# EAGLE board pde_avc_5 (EAGLE 9.7.0)

Size 270.65 x 152.55 mm. Coordinates in mm from the lower left corner, seen from the top.
Outline: 0,0 270.65,0 270.65,152.55 0,152.55 0,0
Copper layers (1*16): Top 0.035mm / dielectric 1.5mm / Bottom 0.035mm
Design rules "default": minimum track width 6mil, minimum drill 0.35mm, track to track 6mil, track to pad 6mil, pad to pad 6mil, via to via 6mil, smd to smd 6mil, copper to edge 40mil, drill to drill 6mil, minimum pad ring 10mil, minimum via ring 8mil, stop-mask expansion 4mil, vias tented up to drill 0mil, thermal gap 10mil

## Footprints (pad centres in the part's own frame; a part is rotated, then mirrored left to right if it is on the bottom)
LEDRD254W60D565H860B = drill 0.981 pad 1.581: 1 -1.27,0; 2 1.27,0
1X08 = drill 1.016 long: 1 -8.89,0; 2 -6.35,0; 3 -3.81,0; 4 -1.27,0; 5 1.27,0; 6 3.81,0; 7 6.35,0; 8 8.89,0
PIEZO = drill 1 pad 1.6: 1 -3.5,0; 2 3.5,0
28027 = drill 1.016 long: 1 -2.54,0; 2 0,0; 3 2.54,0
HA-06-SM065 = drill 1 pad 1.676: 1 -2.54,-2.54; 2 0,2.54; 3 2.54,-2.54
RESAD1016W63L850D250B = drill 0.83 pad 1.43: 1 -5.08,0; 2 5.08,0
ARDUINO-UNO-R3-SHIELD = drill 1.016 pad 1.88: 3.3V 24.13,-2.54; 5V 24.13,0; A0 24.13,12.7; A1 24.13,15.24; A2 24.13,17.78; A3 24.13,20.32; A4 24.13,22.86; A5 24.13,25.4; AREF -24.13,-13.97; D2 -24.13,20.32; D3 -24.13,17.78; D4 -24.13,15.24; D5 -24.13,12.7; D6 -24.13,10.16; D7 -24.13,7.62; D8 -24.13,3.81; D9 -24.13,1.27; D10 -24.13,-1.27; D11 -24.13,-3.81; D12 -24.13,-6.35; D13 -24.13,-8.89; GND@0 24.13,2.54; GND@1 24.13,5.08; GND@2 -24.13,-11.43; IOREF 24.13,-7.62; NC 24.13,-10.16; RES 24.13,-5.08; RX -24.13,25.4; SCL -24.13,-19.05; SDA -24.13,-16.51; TX -24.13,22.86; VIN 24.13,7.62
JHD-162A = drill 1.016 long: 1 -19.05,0; 2 -16.51,0; 3 -13.97,0; 4 -11.43,0; 5 -8.89,0; 6 -6.35,0; 7 -3.81,0; 8 -1.27,0; 9 1.27,0; 10 3.81,0; 11 6.35,0; 12 8.89,0; 13 11.43,0; 14 13.97,0; 15 16.51,0; 16 19.05,0

## Placement (x,y rotation side)
D1  RED  [LEDRD254W60D565H860B]  102.13,114.94 180 top
KEYPADTECLADO_MATRICIAL_4X4  KEYPAD-4X4  [1X08]  122.31,104.65 0 top
PIEZOBUZZER_1  PIEZO  [PIEZO]  20.4,13.58 0 top
PIRSENSOR_PIR_1  PIR-SENSOR_28027  [28027]  225.03,48.31 0 top
RPOT1  250k  [HA-06-SM065]  246.11,145.5 0 top
RRESISITOR_7  220  [RESAD1016W63L850D250B]  103.4,107.51 90 top
RRESISTOR_5  330k  [RESAD1016W63L850D250B]  234.07,130.11 90 top
RRESISTOR_6  1k  [RESAD1016W63L850D250B]  8.97,11.04 0 top
UARDUINO_UNO_R3_1  ARDUINO-UNO-R3-SHIELD  [ARDUINO-UNO-R3-SHIELD]  111.88,65.96 270 top
ULCD_16X2  LCD-16X2JHD-162A  [JHD-162A]  215.02,115 0 top

## Library data of the parts
D1 = Tinkercad; CATEGORY: Opto-Electronic; SUB-CATEGORY: LED; VALUE: LED_RED
KEYPADTECLADO_MATRICIAL_4X4 PIEZOBUZZER_1 PIRSENSOR_PIR_1 RPOT1 RRESISITOR_7 RRESISTOR_5 RRESISTOR_6 UARDUINO_UNO_R3_1 ULCD_16X2 = Tinkercad

## Nets
D1_A: D1.1 RRESISITOR_7.2
PIEZOBUZZER_1_1: PIEZOBUZZER_1.1 RRESISTOR_6.2
UARDUINO_UNO_R3_1_5V: PIRSENSOR_PIR_1.2 RPOT1.1 UARDUINO_UNO_R3_1.5V ULCD_16X2.2 ULCD_16X2.15
UARDUINO_UNO_R3_1_A0: PIRSENSOR_PIR_1.1 UARDUINO_UNO_R3_1.A0 ULCD_16X2.4
UARDUINO_UNO_R3_1_A1: UARDUINO_UNO_R3_1.A1 ULCD_16X2.6
UARDUINO_UNO_R3_1_A2: UARDUINO_UNO_R3_1.A2 ULCD_16X2.11
UARDUINO_UNO_R3_1_A3: UARDUINO_UNO_R3_1.A3 ULCD_16X2.12
UARDUINO_UNO_R3_1_A4: UARDUINO_UNO_R3_1.A4 ULCD_16X2.13
UARDUINO_UNO_R3_1_A5: UARDUINO_UNO_R3_1.A5 ULCD_16X2.14
UARDUINO_UNO_R3_1_D2: KEYPADTECLADO_MATRICIAL_4X4.8 UARDUINO_UNO_R3_1.D2
UARDUINO_UNO_R3_1_D3: KEYPADTECLADO_MATRICIAL_4X4.7 UARDUINO_UNO_R3_1.D3
UARDUINO_UNO_R3_1_D4: KEYPADTECLADO_MATRICIAL_4X4.6 UARDUINO_UNO_R3_1.D4
UARDUINO_UNO_R3_1_D5: KEYPADTECLADO_MATRICIAL_4X4.5 UARDUINO_UNO_R3_1.D5
UARDUINO_UNO_R3_1_D6: KEYPADTECLADO_MATRICIAL_4X4.4 UARDUINO_UNO_R3_1.D6
UARDUINO_UNO_R3_1_D7: KEYPADTECLADO_MATRICIAL_4X4.3 UARDUINO_UNO_R3_1.D7
UARDUINO_UNO_R3_1_D8: KEYPADTECLADO_MATRICIAL_4X4.2 UARDUINO_UNO_R3_1.D8
UARDUINO_UNO_R3_1_D9: KEYPADTECLADO_MATRICIAL_4X4.1 UARDUINO_UNO_R3_1.D9
UARDUINO_UNO_R3_1_D12: RRESISTOR_6.1 UARDUINO_UNO_R3_1.D12
UARDUINO_UNO_R3_1_D13: RRESISITOR_7.1 UARDUINO_UNO_R3_1.D13
UARDUINO_UNO_R3_1_GND: D1.2 PIEZOBUZZER_1.2 PIRSENSOR_PIR_1.3 RPOT1.3 RRESISTOR_5.2 UARDUINO_UNO_R3_1.GND@0 UARDUINO_UNO_R3_1.GND@1 UARDUINO_UNO_R3_1.GND@2 ULCD_16X2.1 ULCD_16X2.5
ULCD_16X2_LED-: RRESISTOR_5.1 ULCD_16X2.16
ULCD_16X2_VO: RPOT1.2 ULCD_16X2.3

## Tracks (layer width: path | path; a pad name or v marks a point on that pad's centre or on a via)
D1_A  (1 unrouted)
PIEZOBUZZER_1_1  (1 unrouted)
UARDUINO_UNO_R3_1_5V  (4 unrouted)
UARDUINO_UNO_R3_1_A0  (2 unrouted)
UARDUINO_UNO_R3_1_A1  (1 unrouted)
UARDUINO_UNO_R3_1_A2  (1 unrouted)
UARDUINO_UNO_R3_1_A3  (1 unrouted)
UARDUINO_UNO_R3_1_A4  (1 unrouted)
UARDUINO_UNO_R3_1_A5  (1 unrouted)
UARDUINO_UNO_R3_1_D2  (1 unrouted)
UARDUINO_UNO_R3_1_D3  (1 unrouted)
UARDUINO_UNO_R3_1_D4  (1 unrouted)
UARDUINO_UNO_R3_1_D5  (1 unrouted)
UARDUINO_UNO_R3_1_D6  (1 unrouted)
UARDUINO_UNO_R3_1_D7  (1 unrouted)
UARDUINO_UNO_R3_1_D8  (1 unrouted)
UARDUINO_UNO_R3_1_D9  (1 unrouted)
UARDUINO_UNO_R3_1_D12  (1 unrouted)
UARDUINO_UNO_R3_1_D13  (1 unrouted)
UARDUINO_UNO_R3_1_GND  (9 unrouted)
ULCD_16X2_LED-  (1 unrouted)
ULCD_16X2_VO  (1 unrouted)